# Altium PCB RF-UNIT.PcbDoc (part 1 of 3)
Units mm, origin at the board's own origin, x right, y up, seen from the top; angles counter-clockwise.
Board outline 187 x 77 mm, 2 copper layers (Top Layer, Top, Bottom Layer, Bottom); 286 components, 158 nets, 740 pads, 1203 vias.
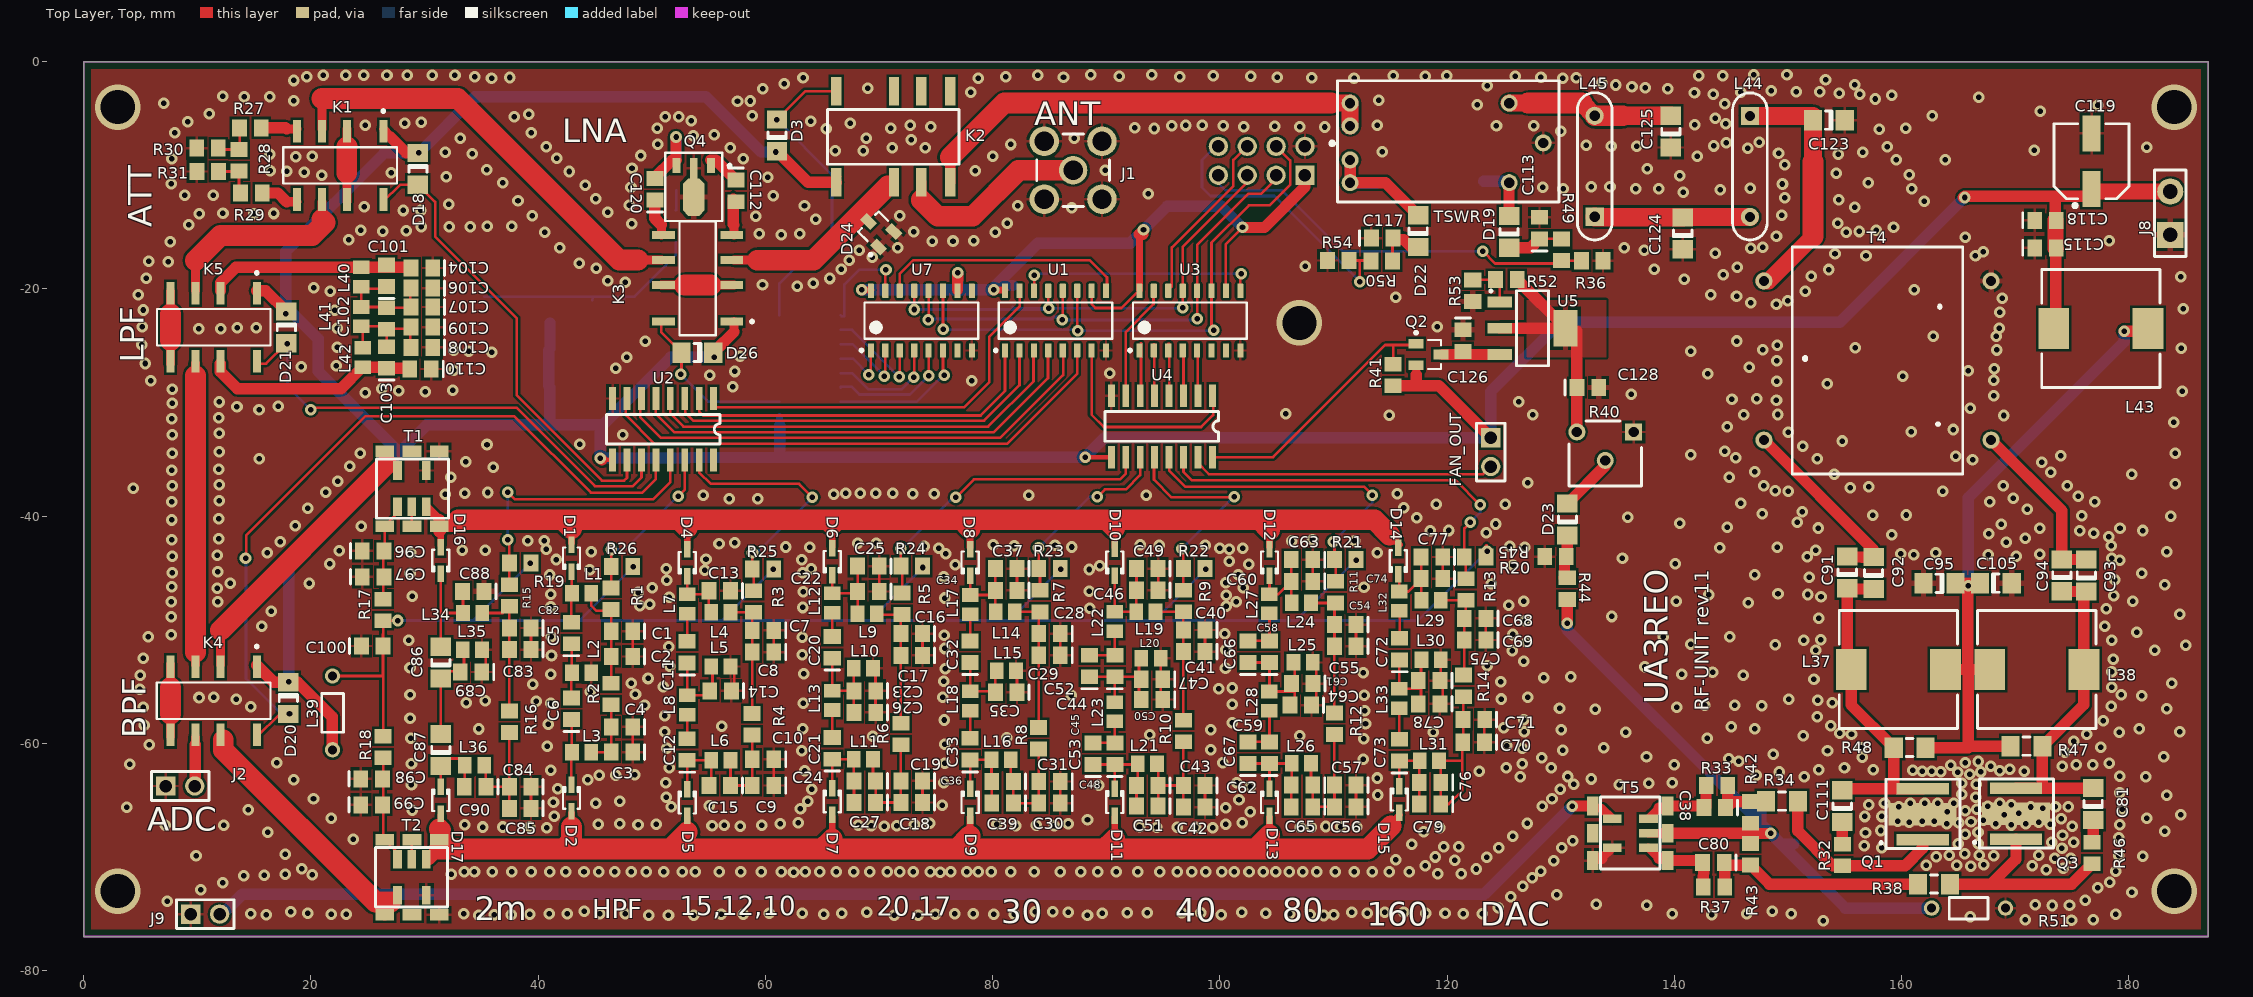
[diagram p0: Top Layer, Top view]
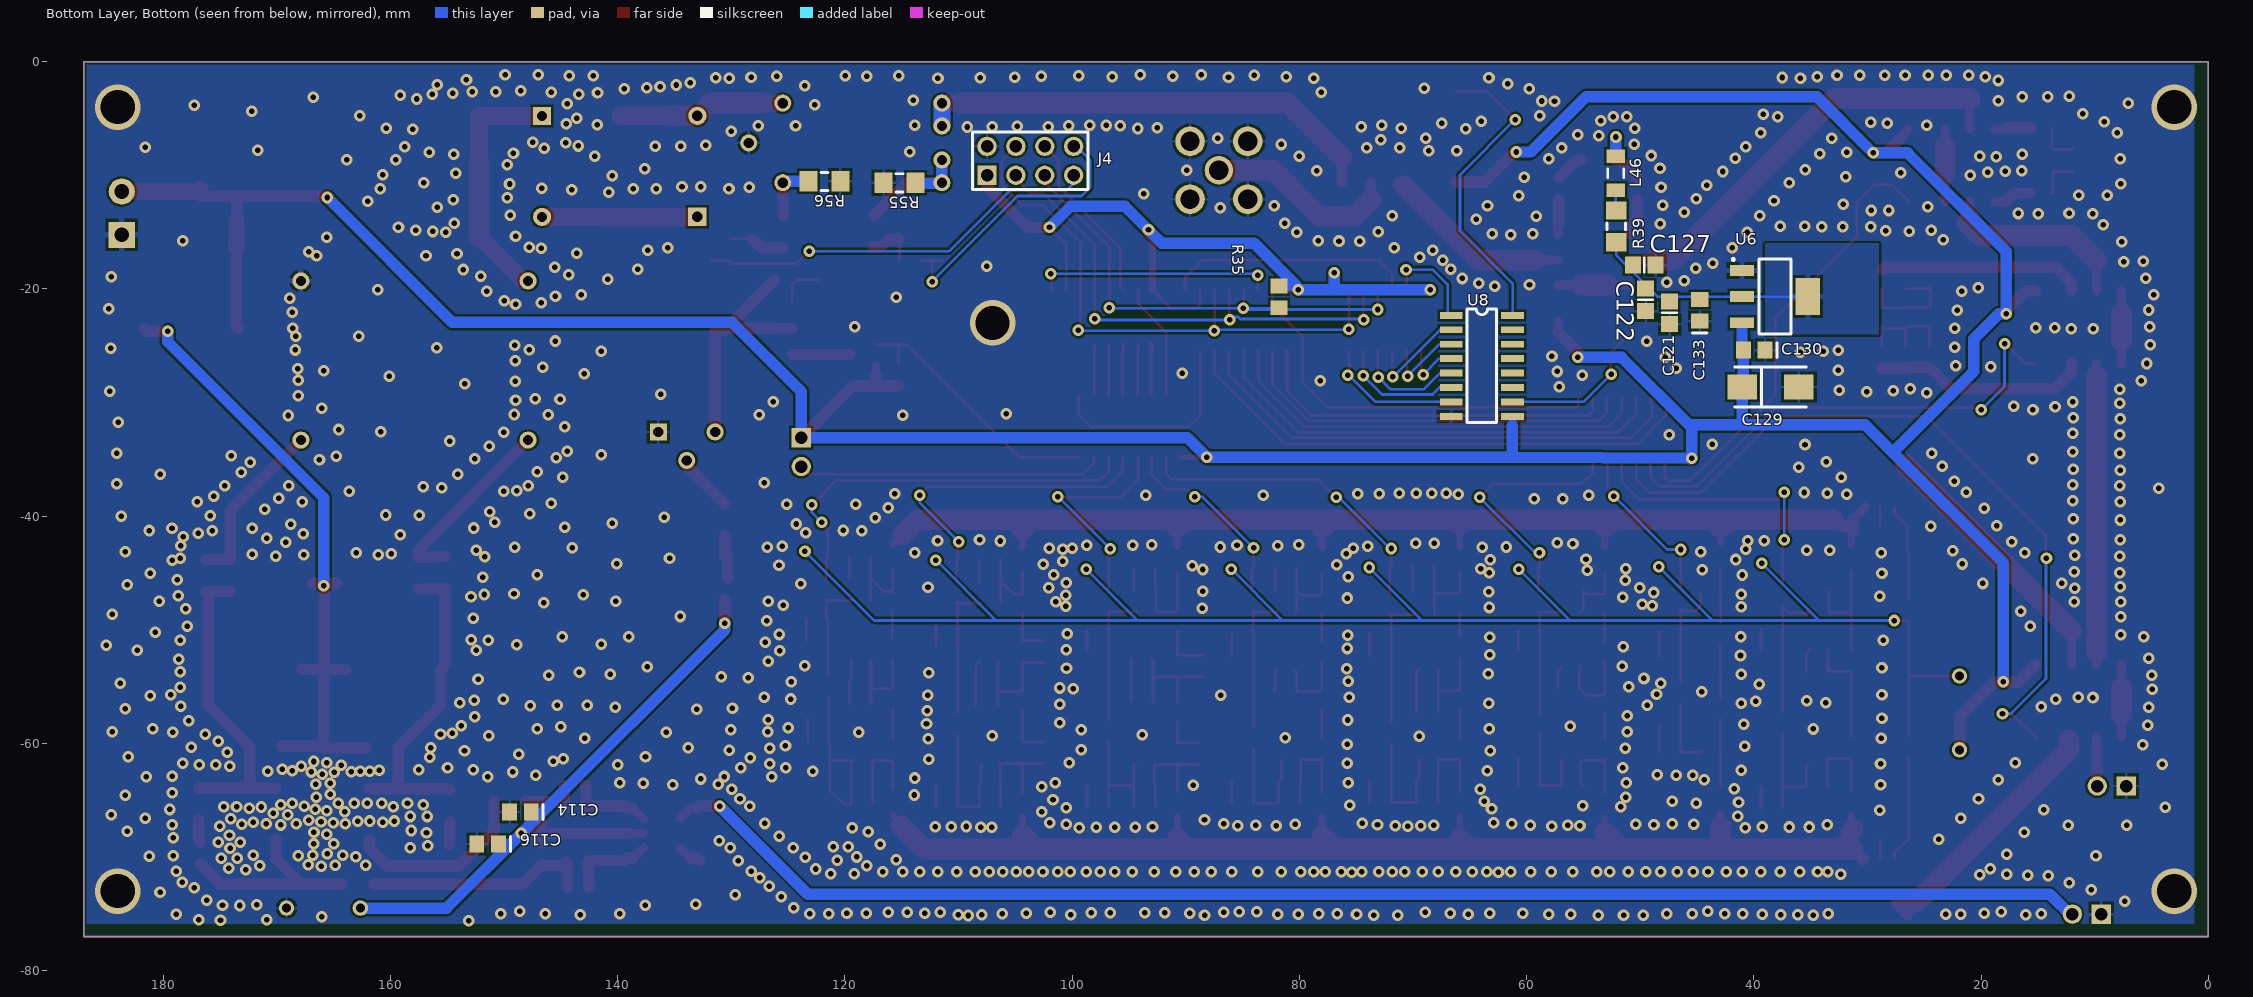
[diagram p1: Bottom Layer, Bottom view, seen from below]

## Layer stack, top to bottom
Top Solder, Top Mask: solder mask 0.0102, Solder Resist, Dk 3.5
Top Layer, Top: signal copper 0.0356
Dielectric 1: dielectric 0.32, FR-4, Dk 4.8
Bottom Layer, Bottom: signal copper 0.0356
Bottom Solder, Bot Mask: solder mask 0.0102, Solder Resist, Dk 3.5

## Board outline
0,-77 187,-77 187,0 0,0

## Design rules (kind name [scope] priority, off if disabled: settings)
BoardOutlineClearance [All] p1: gap=0.2 ignorepadtopadclearanceinfootprint=FALSE except(0.4: Arc-SplitBarrior Arc-SplitContinuation Track-SplitBarrior Track-SplitContinuation SMDPad-SplitBarrior SMDPad-SplitContinuation THPad-SplitBarrior THPad-SplitContinuation Via-SplitBarrior Via-SplitContinuation Fill-SplitBarrior Fill-SplitContinuation Poly-SplitBarrior Poly-SplitContinuation Region-SplitBarrior Region-SplitContinuation Text-SplitBarrior Text-SplitContinuation)
Clearance "Clearance Bottom Layer" [OnLayer('Bottom Layer')] p1: gap=0.203 ignorepadtopadclearanceinfootprint=TRUE except(0.254: Arc-Text Track-Text SMDPad-Text THPad-Text Via-Text Fill-Text Poly-Text Region-Text Text-Text)
Clearance "Clearance Top Layer" [OnLayer('Top Layer')] p2: gap=0.203 ignorepadtopadclearanceinfootprint=TRUE except(0.254: Arc-Text Track-Text SMDPad-Text THPad-Text Via-Text Fill-Text Poly-Text Region-Text Text-Text)
Clearance [All] p3: gap=0.2 ignorepadtopadclearanceinfootprint=FALSE except(0.089: Arc-Arc Arc-Track Arc-SMDPad Track-Track Track-SMDPad SMDPad-SMDPad; 0.127: Arc-Via Track-Via SMDPad-Via THPad-Via Via-Via; 0.254: Arc-Text Track-Text SMDPad-Text THPad-Text Via-Text Fill-Text Poly-Text Region-Text Text-Text)
HoleSize [All] p1: absolutevalues=TRUE maxlimit=6.3 minlimit=0.2 maxpercent=80.000 minpercent=20.000
MinimumAnnularRing [All] p1: minimumring=0.076
MinimumSolderMaskSliver [All] p1: minsoldermaskwidth=0.01
PolygonConnect PolygonConnect_1 [All] p1: thpad.connectstyle=Relief thpad.reliefconductorwidth=0.508 thpad.reliefentries=4 thpad.polygonreliefangle="90 Angle" thpad.airgapwidth=0.254 smdpad.connectstyle=Relief smdpad.reliefconductorwidth=0.508 smdpad.reliefentries=4 smdpad.polygonreliefangle="90 Angle" smdpad.airgapwidth=0.254 via.connectstyle=Direct via.reliefconductorwidth=0.508 via.reliefentries=4 via.polygonreliefangle="90 Angle" via.airgapwidth=0.254
RoomDefinition RF-UNIT [InComponentClass('RF-UNIT')] p1: confinementstyle=ConfineIn formatcopy=TRUE lockcomponents=FALSE outline 0,-77 187,-77 187,0 0,0
RoutingCorners [All] p1: cornerstyle=Round minsetback=2.54 maxsetback=2.54
RoutingVias [All] p1: holewidth=0.5 width=1 viastyle="Through Hole" minholewidth=0.2 minwidth=0.45 maxholewidth=1 maxwidth=2
SilkToSilkClearance [All] p1: silktosilkclearance=0.01
SilkToSolderMaskClearance [IsPad] p1: minsilkscreentomaskgap=0.01 clearancetoexposedcopper=TRUE
SolderMaskExpansion [All] p1: expansion=0.102
Width [All] p1: maxlimit=2.54 minlimit=0.089 preferedwidth=0.381
25 further rules are at their usual default settings.

## Components (designator, comment, footprint, x,y, rotation, side; value= is the part's Value field where it differs from the comment)
C1 "CAP_0805" CAP_0805#1 47.577,-50.131 r180 top value=470pF
C2 "CAP_0805" CAP_0805#1 47.577,-52.353 r180 top value=100nF
C3 "CAP_0805" CAP_0805#1 47.577,-60.767 r180 top value=100nF
C4 "CAP_0805" CAP_0805#1 47.577,-58.544 r180 top value=470pF
C5 "CAP_0805" CAP_0805#1 42.929,-50.492 r90 top value=100pF
C6 "CAP_0805" CAP_0805#1 42.929,-57.159 r90 top value=82pF
C7 "CAP_0805" CAP_0805#1 59.993,-50.059 r180 top value=470pF
C8 "CAP_0805" CAP_0805#1 59.993,-51.964 r180 top value=100nF
C9 "CAP_0805" CAP_0805#1 59.993,-63.711 r180 top value=100nF
C10 "CAP_0805" CAP_0805#1 59.993,-61.396 r180 top value=470pF
C11 "CAP_0805" CAP_0805#1 53.122,-52.166 r90 top value=18pF
C12 "CAP_0805" CAP_0805#1 53.122,-60.739 r90 top value=18pF
C13 "CAP_0805" CAP_0805#1 56.183,-46.566 r180 top value=47pF
C14 "CAP_0805" CAP_0805#1 56.261,-55.372 r180 top value=68pF
C15 "CAP_0805" CAP_0805#1 56.183,-63.711 r180 top value=47pF
C16 "CAP_0805" CAP_0805#1 73.076,-50.349 r180 top value=470pF
C17 "CAP_0805" CAP_0805#1 73.076,-52.254 r180 top value=100nF
C18 "CAP_0805" CAP_0805#1 73.076,-65.205 r180 top value=100nF
C19 "CAP_0805" CAP_0805#1 73.076,-63.3 r180 top value=470pF
C20 "CAP_0805" CAP_0805#1 65.888,-51.755 r90 top value=27pF
C21 "CAP_0805" CAP_0805#1 65.888,-60.645 r90 top value=27pF
C22 "CAP_0805" CAP_0805#1 69.266,-46.631 r180 top value=68pF
C23 "CAP_0805" CAP_0805#1 68.961,-55.372 r180 top value=120pF
C24 "CAP_0805" CAP_0805#1 68.948,-63.3 r180 top value=68pF
C25 "CAP_0805" CAP_0805#1 69.266,-44.408 r180 top value=10pF
C26 "CAP_0805" CAP_0805#1 68.961,-57.277 r180 top value=27pF
C27 "CAP_0805" CAP_0805#1 68.948,-65.205 r180 top value=10pF
C28 "CAP_0805" CAP_0805#1 85.209,-50.34 r180 top value=470pF
C29 "CAP_0805" CAP_0805#1 85.209,-52.245 r180 top value=100nF
C30 "CAP_0805" CAP_0805#1 85.209,-65.263 r180 top value=100nF
C31 "CAP_0805" CAP_0805#1 85.209,-63.358 r180 top value=470pF
C32 "CAP_0805" CAP_0805#1 78.021,-52.13 r90 top value=47pF
C33 "CAP_0805" CAP_0805#1 78.021,-60.703 r90 top value=47pF
C34 "CAP_0805" CAP_0805#1 81.399,-46.53 r180 top value=120pF
C35 "CAP_0805" CAP_0805#1 81.394,-55.501 r180 top value=220pF
C36 "CAP_0805" CAP_0805#1 81.081,-63.358 r180 top value=120pF
C37 "CAP_0805" CAP_0805#1 81.399,-44.625 r180 top value=33pF
C38 "CAP_0805" CAP_0805#1 143.764,-65.659 r180 top value=470pF
C39 "CAP_0805" CAP_0805#1 81.081,-65.263 r180 top value=33pF
C40 "CAP_0805" CAP_0805#1 97.942,-50.018 r180 top value=470pF
C41 "CAP_0805" CAP_0805#1 97.942,-51.923 r180 top value=100nF
C42 "CAP_0805" CAP_0805#1 97.942,-65.616 r180 top value=100nF
C43 "CAP_0805" CAP_0805#1 97.942,-63.711 r180 top value=470pF
C44 "CAP_0805" CAP_0805#1 90.754,-53.395 r90 top value=51pF
C45 "CAP_0805" CAP_0805#1 90.754,-61.108 r90 top value=51pF
C46 "CAP_0805" CAP_0805#1 93.814,-46.525 r180 top value=220pF
C47 "CAP_0805" CAP_0805#1 94.234,-54.356 r180 top value=360pF
C48 "CAP_0805" CAP_0805#1 93.814,-63.711 r180 top value=220pF
C49 "CAP_0805" CAP_0805#1 93.814,-44.62 r180 top value=33pF
C50 "CAP_0805" CAP_0805#1 94.234,-56.134 r180 top value=51pF
C51 "CAP_0805" CAP_0805#1 93.814,-65.524 r180 top value=33pF
C52 "CAP_0805" CAP_0805#1 88.531,-53.395 r90 top value=18pF
C53 "CAP_0805" CAP_0805#1 88.849,-61.108 r90 top value=18pF
C54 "CAP_0805" CAP_0805#1 111.237,-49.546 r180 top value=470pF
C55 "CAP_0805" CAP_0805#1 111.237,-51.451 r180 top value=100nF
C56 "CAP_0805" CAP_0805#1 111.237,-65.58 r180 top value=100nF
C57 "CAP_0805" CAP_0805#1 111.237,-63.675 r180 top value=470pF
C58 "CAP_0805" CAP_0805#1 104.367,-52.131 r90 top value=100pF
C59 "CAP_0805" CAP_0805#1 104.367,-61.021 r90 top value=100pF
C60 "CAP_0805" CAP_0805#1 107.427,-45.736 r180 top value=360pF
C61 "CAP_0805" CAP_0805#1 107.454,-54.737 r180 top value=680pF
C62 "CAP_0805" CAP_0805#1 107.427,-63.675 r180 top value=360pF
C63 "CAP_0805" CAP_0805#1 107.427,-43.831 r180 top value=68pF
C64 "CAP_0805" CAP_0805#1 107.315,-56.642 r180 top value=100pF
C65 "CAP_0805" CAP_0805#1 107.427,-65.58 r180 top value=68pF
C66 "CAP_0805" CAP_0805#1 102.462,-52.131 r90 top value=39pF
C67 "CAP_0805" CAP_0805#1 102.462,-61.021 r90 top value=39pF
C68 "CAP_0805" CAP_0805#1 122.669,-49 r180 top value=470pF
C69 "CAP_0805" CAP_0805#1 122.669,-50.905 r180 top value=100nF
C70 "CAP_0805" CAP_0805#1 122.533,-59.901 r180 top value=100nF
C71 "CAP_0805" CAP_0805#1 122.556,-57.906 r180 top value=470pF
C72 "CAP_0805" CAP_0805#1 115.822,-51.901 r90 top value=200pF
C73 "CAP_0805" CAP_0805#1 115.799,-60.791 r90 top value=200pF
C74 "CAP_0805" CAP_0805#1 118.859,-45.507 r180 top value=820pF
C75 "CAP_0805" CAP_0805#1 118.618,-54.483 r180 top value=1000pF
C76 "CAP_0805" CAP_0805#1 118.701,-63.446 r180 top value=820pF
C77 "CAP_0805" CAP_0805#1 118.859,-43.602 r180 top value=120pF
C78 "CAP_0805" CAP_0805#1 118.618,-56.515 r180 top value=220pF
C79 "CAP_0805" CAP_0805#1 118.701,-65.351 r180 top value=120pF
C80 "CAP_0805" CAP_0805#1 143.637,-70.485 r180 top value=470pF
C81 "CAP_1206" CAP_1206 176.866,-65.341 r90 top value=47nF
C82 "CAP_0805" CAP_0805#1 38.62,-49.848 r180 top value=470pF
C83 "CAP_0805" CAP_0805#1 38.62,-51.753 r180 top value=100nF
C84 "CAP_0805" CAP_0805#1 38.62,-63.817 r180 top value=100nF
C85 "CAP_0805" CAP_0805#1 38.62,-65.722 r180 top value=470pF
C86 "CAP_0805" CAP_1206 31.432,-52.903 r90 top value=6.5-30pF
C87 "CAP_0805" CAP_1206 31.432,-60.579 r90 top value=6.5-30pF
C88 "CAP_0805" CAP_0805#1 34.493,-46.622 r180 top value=120pF
C89 "CAP_0805" CAP_0805#1 34.29,-53.721 r180 top value=100pF
C90 "CAP_0805" CAP_0805#1 34.652,-63.817 r180 top value=120pF
C91 "CAP_1206" CAP_1206 155.219,-44.946 r90 top value="2.2uF 100V"
C92 "CAP_1206" CAP_1206 157.533,-45.008 r90 top value="1800pF 100V"
C93 "CAP_1206" CAP_1206 176.257,-45.229 r90 top value="2.2uF 100V"
C94 "CAP_1206" CAP_1206 174.108,-45.213 r90 top value="1800pF 100V"
C95 "CAP_1206" CAP_1206 163.338,-45.911 r180 top value="2.2uF 100V"
C96 "CAP_0805" CAP_0805#1 25.273,-43.053 r0 top value=470pF
C97 "CAP_0805" CAP_0805#1 25.273,-45.339 r0 top value=100nF
C98 "CAP_0805" CAP_0805#1 25.146,-63.119 r0 top value=470pF
C99 "CAP_0805" CAP_0805#1 25.146,-65.405 r0 top value=100nF
C100 "CAP_0805" CAP_0805#1 25.197,-51.435 r0 top value=100nF
C101 "CAP_0805" CAP_0805#1 26.67,-19.05 r90 top value=82pF
C102 "CAP_0805" CAP_0805#2 26.67,-22.606 r90 top value=120pF
C103 "CAP_0805" CAP_0805#1 26.668,-26.235 r90 top value=22pF
C104 "CAP_0805" CAP_0805#1 29.972,-18.161 r180 top value=51pF
C105 "CAP_1206" CAP_1206 168.291,-45.898 r0 top value="1800pF 100V"
C106 "CAP_0805" CAP_0805#1 29.972,-19.939 r180 top value=10pF
C107 "CAP_0805" CAP_0805#1 29.972,-21.59 r180 top value=100pF
C108 "CAP_0805" CAP_0805#1 29.972,-25.146 r180 top value=33pF
C109 "CAP_0805" CAP_0805#1 29.972,-23.368 r180 top value=100pF
C110 "CAP_0805" CAP_0805#1 29.845,-27.051 r180 top value=100pF
C111 "CAP_1206" CAP_1206 154.778,-65.532 r90 top value=47nF
C112 "CAP_0805" CAP_0805#1 57.404,-11.176 r270 top value=10n
C113 "CAP_0805" CAP_0805#1 128.132,-14.854 r90 top value=100nF
C114 "CAP_0805" CAP_0805#1 148.361,-66.04 r0 bottom value=8200pF
C115 "CAP_0805" CAP_0805#1 172.466,-16.383 r0 top value=1nF
C116 "CAP_0805" CAP_0805#1 151.244,-68.861 r0 bottom value=100n
C117 "CAP_0805" CAP_0805#1 114.086,-15.533 r0 top value=100nF
C118 "CAP_0805" CAP_0805#1 172.466,-13.97 r0 top value=100nF
C119 "CAPAE_6.6x6.6h5.4" CAPAE_6.6x6.6h5.4 176.721,-8.855 r90 top value=47uF
C120 "CAP_0805" CAP_0805#1 50.292,-11.43 r90 top value=10n
C121 "CAP_0805" 6-0805_M 47.416,-22.107 r90 bottom value=10n
C122 "CAP_0805" 6-0805_M 49.53,-20.955 r90 bottom value=1n
C123 "CAP_1206" CAP_1206 153.593,-5.147 r180 top value=120pF
C124 "CAP_1206" CAP_1206 140.74,-15.111 r90 top value=180pF
C125 "CAP_1206" CAP_1206 139.689,-6.157 r90 top value=120pF
C126 "CAP_0805" CAP_0805#1 121.404,-24.353 r270 top value=1uF
C127 "CAP_0805" 6-0805_M 49.641,-17.907 r0 bottom value=100p
C128 "CAP_0805" CAP_0805#1 132.193,-28.674 r0 top value=1uF
C129 "CAPAE_5.3x5.3h6.1" CAPAE_5.3x5.3h6.1 38.536,-28.638 r180 bottom value="10uF 25V"
C130 "CAP_0805" CAP_0805#1 39.77,-25.387 r0 bottom value=100n
C133 "CAP_0805" CAP_0805#1 44.765,-22.082 r90 bottom value=100n
D1 "BAP64-03" SOD-323 42.929,-43.705 r270 top
D2 "BAP64-03" SOD-323 42.929,-64.812 r90 top
D3 "1N4148" 1N4148 61.024,-6.483 r90 top
D4 "BAP64-03" SOD-323 53.122,-44.109 r270 top
D5 "BAP64-03" SOD-323 53.122,-65.216 r90 top
D6 "BAP64-03" SOD-323 65.888,-44.015 r270 top
D7 "BAP64-03" SOD-323 65.888,-65.122 r90 top
D8 "BAP64-03" SOD-323 78.021,-44.073 r270 top
D9 "BAP64-03" SOD-323 78.021,-65.18 r90 top
D10 "BAP64-03" SOD-323 90.754,-44.068 r270 top
D11 "BAP64-03" SOD-323 90.754,-65.175 r90 top
D12 "BAP64-03" SOD-323 104.367,-44.073 r270 top
D13 "BAP64-03" SOD-323 104.367,-65.18 r90 top
D14 "BAP64-03" SOD-323 115.697,-43.942 r270 top
D15 "BAP64-03" SOD-323 115.799,-64.951 r90 top
D16 "BAP64-03" SOD-323 31.432,-43.898 r270 top
D17 "BAP64-03" SOD-323 31.432,-65.005 r90 top
D18 "1N4148" 1N4148 29.421,-9.439 r270 top
D19 "DIODE_1206" DIODE_1206 125.452,-14.977 r90 top value=1N4148
D20 "1N4148" 1N4148 18.018,-56.016 r270 top
D21 "1N4148" 1N4148 17.843,-23.387 r270 top
D22 "DIODE_1206" DIODE_1206 117.452,-14.925 r90 top value=1N4148
D23 "SS14" SS14 130.592,-40.298 r90 top
D24 "BAV99" SOT23 69.85,-14.859 r45 top
D26 "1N4148" 1N4148 54.021,-25.607 r180 top
FAN_OUT "51022-0200" 51022-0200 124.478,-34.365 r270 top
J1 "31-5431" 31-5431 87.086,-9.559 r180 top value=ANT
J2 "644456-2" 644456-2 8.509,-63.119 r0 top value=ADC_OUT
J4 "90131-0124" 90131-0124 103.682,-8.727 r180 bottom value=MOTHERBOARD
J8 "1986717-2" 1986717-2 183.648,-13.338 r90 top value=13.8V
J9 "644456-2" 644456-2 10.7,-74.395 r0 top value=DAC_IN
K1 "IM06DGR" TECO-SMT-8_V 22.575,-9.129 r270 top
K2 "Axicom V23079" V23079 66.234,-6.614 r90 top
K3 "IM06DGR" TECO-SMT-8_V 54.044,-19.074 r180 top
K4 "IM06DGR" TECO-SMT-8_V 11.442,-56.252 r270 top
K5 "IM06DGR" TECO-SMT-8_V 11.447,-23.374 r270 top
L1 "IND_0805" IND_0805 43.825,-46.797 r180 top value=470nH
L2 "IND_0805" IND_0805 43.825,-53.782 r180 top value=150nH
L3 "IND_0805" IND_0805 43.825,-60.767 r180 top value=150nH
L4 "IND_0805" IND_0805 56.083,-48.471 r180 top value=680nH
L5 "IND_0805" IND_0805 56.083,-53.234 r180 top value=470nH
L6 "IND_0805" IND_0805 56.083,-61.489 r180 top value=680nH
L7 "IND_0805" IND_0805 53.122,-47.734 r270 top value=1.5uH
L8 "IND_0805" IND_0805 53.122,-56.624 r270 top value=1.5uH
L9 "IND_0805" IND_0805 68.96,-48.581 r180 top value=1.2uH
L10 "IND_0805" IND_0805 68.623,-53.406 r180 top value=680nH
L11 "IND_0805" IND_0805 68.623,-61.395 r180 top value=1.2uH
L12 "IND_0805" IND_0805 65.888,-47.64 r270 top value=3.3uH
L13 "IND_0805" IND_0805 65.888,-56.212 r270 top value=3.3uH
L14 "IND_0805" IND_0805 81.114,-48.435 r180 top value=1.5uH
L15 "IND_0805" IND_0805 81.206,-53.596 r180 top value=1.2uH
L16 "IND_0805" IND_0805 80.756,-61.453 r180 top value=1.5uH
L17 "IND_0805" IND_0805 78.021,-47.79 r270 top value=5.6uH
L18 "IND_0805" IND_0805 78.021,-56.27 r270 top value=5.6uH
L19 "IND_0805" IND_0805 93.488,-48.43 r180 top value=2.7uH
L20 "IND_0805" IND_0805 93.939,-52.517 r180 top value=1.5uH
L21 "IND_0805" IND_0805 93.621,-61.806 r180 top value=2.7uH
L22 "IND_0805" IND_0805 90.754,-49.28 r270 top value=10uH
L23 "IND_0805" IND_0805 90.754,-57.218 r270 top value=10uH
L24 "IND_0805" IND_0805 107.168,-47.641 r180 top value=4.7uH
L25 "IND_0805" IND_0805 107.327,-52.88 r180 top value=2.7uH
L26 "IND_0805" IND_0805 107.168,-61.77 r180 top value=4.7uH
L27 "IND_0805" IND_0805 104.367,-47.713 r270 top value=15uH
L28 "IND_0805" IND_0805 104.367,-56.285 r270 top value=15uH
L29 "IND_0805" IND_0805 118.6,-47.412 r180 top value=6.8uH
L30 "IND_0805" IND_0805 118.6,-52.651 r180 top value=4.7uH
L31 "IND_0805" IND_0805 118.442,-61.541 r180 top value=6.8uH
L32 "IND_0805" IND_0805 115.799,-47.483 r270 top value=33uH
L33 "IND_0805" IND_0805 115.799,-56.056 r270 top value=33uH
L34 "IND_0805" IND_0805 34.234,-48.527 r180 top value=8.2nH
L35 "IND_0805" IND_0805 34.215,-51.753 r180 top value=8.2nH
L36 "IND_0805" IND_0805 34.393,-61.912 r180 top value=8.2nH
L37 "IND_FERRITE_CORE" IND_FERRITE_CORE 159.712,-53.496 r0 top value=10uH
L38 "IND_FERRITE_CORE" IND_FERRITE_CORE 171.898,-53.491 r0 top value=10uH
L39 "IND_FERRITE_BEAD" IND_FERRITE_BEAD 21.907,-57.318 r270 top value=FB
L40 "IND_0805" IND_0805 24.447,-18.948 r270 top value=150nH
L41 "IND_0805" IND_0805 24.447,-22.44 r270 top value=150nH
L42 "IND_0805" IND_0805 24.55,-26.035 r270 top value=330nH
L43 "IND_FERRITE_CORE" IND_FERRITE_CORE 177.535,-23.481 r180 top value=10uH
L44 "IND_FERRITE_CORE" IND_FERRITE_CORE_1 146.654,-9.22 r270 top value=169nH
L45 "IND_FERRITE_CORE" IND_FERRITE_CORE_1 132.988,-9.214 r90 top value=169nH
L46 "IND_1206" IND_1206 52.157,-9.822 r90 bottom value=220nH
Q1 "RD07MVS1" RD07MVS1 161.567,-66.213 r0 top
Q2 "MOSFET_ENH_PD" SOT23 118.364,-25.781 r270 top value=IRLML9301
Q3 "RD07MVS1" RD07MVS1 169.791,-66.173 r0 top
Q4 "PGA-103+" SOT89 53.697,-10.532 r180 top
R1 "RES_0805" RES_0805 46.422,-47.27 r270 top value=56
R2 "RES_0805" RES_0805 46.422,-55.658 r270 top value=120
R3 "RES_0805" RES_0805 58.965,-47.516 r270 top value=56
R4 "RES_0805" RES_0805 58.837,-58.311 r270 top value=120
R5 "RES_0805" RES_0805 72.036,-47.714 r270 top value=56
R6 "RES_0805" RES_0805 71.92,-59.17 r270 top value=120
R7 "RES_0805" RES_0805 84.169,-47.48 r270 top value=56
R8 "RES_0805" RES_0805 84.054,-59.545 r270 top value=120
R9 "RES_0805" RES_0805 96.786,-47.475 r270 top value=56
R10 "RES_0805" RES_0805 96.786,-58.905 r270 top value=120
R11 "RES_0805" RES_0805 110.198,-46.686 r270 top value=56
R12 "RES_0805" RES_0805 110.082,-58.275 r270 top value=120
R13 "RES_0805" RES_0805 121.654,-46.457 r270 top value=56
R14 "RES_0805" RES_0805 121.424,-54.94 r270 top value=120
R15 "RES_0805" RES_0805 37.465,-46.988 r270 top value=56
R16 "RES_0805" RES_0805 37.465,-58.1 r270 top value=120
R17 "RES_0805" RES_0805 26.352,-48.258 r270 top value=220
R18 "RES_0805" RES_0805 26.352,-60.323 r270 top value=220
R19 "RES_0805" RES_0805 38.42,-44.133 r180 top value=10k
R20 "RES_0805" RES_0805 122.469,-43.602 r180 top value=10k
R21 "RES_0805" RES_0805 111.037,-43.831 r180 top value=10k
R22 "RES_0805" RES_0805 97.741,-44.62 r180 top value=10k
R23 "RES_0805" RES_0805 85.009,-44.625 r180 top value=10k
R24 "RES_0805" RES_0805 72.875,-44.408 r180 top value=10k
R25 "RES_0805" RES_0805 59.793,-44.661 r180 top value=10k
R26 "RES_0805" RES_0805 47.377,-44.416 r180 top value=10k
R27 "RES_0805" RES_0805 14.677,-5.822 r180 top value=15
R28 "RES_0805" RES_0805 13.665,-8.681 r270 top value=39
R29 "RES_0805" RES_0805 14.764,-11.564 r0 top value=15
R30 "RES_0805" RES_0805 10.905,-7.615 r0 top value=68
R31 "RES_0805" RES_0805 10.915,-9.67 r0 top value=68
R32 "RES_0805" RES_0805 154.796,-69.821 r90 top value=560
R33 "RES_0805" RES_0805 143.749,-63.723 r0 top value=5.6
R34 "RES_1206" RES_1206 149.477,-65.084 r0 top value=5.6
R35 "RES_0805" RES_0805 81.788,-20.701 r270 bottom value=1k
R36 "RES_0805" RES_0805 132.773,-17.523 r0 top value=510
R37 "RES_0805" RES_0805 143.494,-72.649 r0 top value=5.6
R38 "RES_1206" RES_1206 162.858,-72.385 r0 top value=5.6
R39 "RES_1206" RES_1206 52.111,-14.492 r90 bottom value=18
R40 "306J" 306J 133.921,-34.495 r270 top value=1k
R41 "RES_0805" RES_0805 115.259,-27.582 r270 top value=10k
R42 "RES_0805" RES_0805 146.703,-66.077 r90 top value=1k
R43 "RES_0805" RES_0805 146.7,-69.766 r90 top value=1k
R44 "RES_0805" RES_0805 130.575,-46.383 r270 top value=56
R45 "RES_0805" RES_0805 129.54,-43.561 r0 top value=10k
R46 "RES_0805" RES_0805 176.765,-69.649 r90 top value=560
R47 "RES_1206" RES_1206 170.992,-60.246 r180 top value=300
R48 "RES_1206" RES_1206 160.706,-60.371 r180 top value=300
R49 "RES_0805" RES_0805 130.078,-16.561 r270 top value=0
R50 "RES_0805" RES_0805 114.246,-17.542 r180 top value=0
R51 "RES" RES 165.898,-74.5 r0 top value="TERMO 1K"
R52 "RES_0805" RES_0805 125.222,-19.177 r180 top value=200
R53 "RES_0805" RES_0805 122.258,-20.157 r90 top value=1.2k
R54 "RES_0805" RES_0805 110.427,-17.501 r0 top value=510
R55 "RES_1206" RES_1206 115.189,-10.668 r0 bottom value=50
R56 "RES_1206" RES_1206 121.793,-10.541 r180 bottom value=50
T1 "TRANSF_ACORE2" TRANSF_ACORE2 28.892,-37.576 r90 top value="1:4 ADT4-6T"
T2 "TRANSF_ACORE2" TRANSF_ACORE2_1 28.892,-71.786 r270 top value="1:4 ADT4-6T"
T4 "TRANSF_ICORE" TRANSF_ICORE 157.881,-26.302 r90 top value="Balun 4turns rg-178 on binocle"
T5 "TRANSF_ACORE2" TRANSF_ACORE2_2 136.126,-67.915 r180 top value="1:1 ADT1-6T"
TSWR "SWR_TANDEM_MATCH" SWR_TANDEM_MATCH 120.111,-7.018 r0 top
U1 "SN74HC595D" D0016A_L 85.538,-22.793 r90 top
U2 "ULN2003BDR" ULN2003BDR 51,-32.351 r270 top value=ULN2003
U3 "SN74HC595D" D0016A_L 97.362,-22.793 r90 top
U4 "ULN2003BDR" ULN2003BDR 94.895,-32.108 r270 top value=ULN2003
U5 "LT1117IST-ADJ" LT1117IST-ADJ 127.524,-23.378 r0 top value=LT1117-ADJ
U6 "AMS1117-5" AMS1117-5 38.146,-20.595 r180 bottom
U7 "SN74HC595D" D0016A_L 73.733,-22.793 r90 top
U8 "ULN2003BDR" ULN2003BDR 63.936,-26.774 r180 bottom value=ULN2003

## Footprints (in the part's own frame and the unit in brackets; to place one, negate y for a bottom-side part, rotate by r counter-clockwise, add the part's x,y. Pads: shape width x height; smd on the part's side, far side on the other; paste and mask are expansions set on the pad)
1N4148 [mm]
  rect 1.6x1.8 smd: 1(-1.4,0) 2(1.4,0)
  silkscreen extent -0.3,-0.8 0.3,0.8
6-0805_M [mm] "Chip Resistor, Body 2.0x1.2mm, IPC Low Density"
  rect 1.4x1.5 smd: 1(-1,0) 2(1,0)
  silkscreen extent 0,-0.65 0,0.65, body extent -1.07,-0.7 1.07,0.7, height 0.7
31-5431 [mm]
  round 2.6 hole 1.7: 1(-2.54,-2.54) 2(2.54,-2.54) 3(2.54,2.54) 4(-2.54,2.54)
  round 2.5 hole 1.7: 5(0,0)
  silkscreen extent -3.2,-3.2 3.2,3.2
306J [mm]
  rect 1.5x1.5 hole 0.9: 1(-1.9,2.5)
  round 1.5 hole 0.9: 2(0.6,0) 3(-1.9,-2.5)
  silkscreen extent -2.85,-3.2 2.85,3.2
51022-0200 [mm]
  rect 1.7x1.7 hole 1.1: 1(-1.27,-0.635)
  round 1.7 hole 1.1: 2(1.27,-0.635)
  silkscreen extent -2.54,-1.91 2.54,0.64
90131-0124 [mm]
  rect 1.7x1.7 hole 1.1: 1(-3.81,-1.27)
  round 1.7 hole 1.1: 2(-3.81,1.27) 3(-1.27,-1.27) 4(-1.27,1.27) 5(1.27,-1.27) 6(1.27,1.27) 7(3.81,-1.27) 8(3.81,1.27)
  silkscreen extent -5.08,-2.54 5.08,2.54
644456-2 [mm]
  rect 1.7x1.7 hole 1.1: 1(-1.27,-0.635)
  round 1.7 hole 1.1: 2(1.27,-0.635)
  silkscreen extent -2.54,-1.91 2.54,0.64
1986717-2 [mm]
  rect 2.3x2.3 hole 1.3: 1(-1.905,0)
  round 2.3 hole 1.3: 2(1.905,0)
  silkscreen extent -3.81,-1.4 3.81,1.4
AMS1117-5 [mm]
  rect 2.15x0.95 smd: 1(-2.9,2.215) 2(-2.9,-0.085) 3(-2.9,-2.385)
  rect 2.15x3.25 smd: 4(2.9,-0.085)
  silkscreen extent -3.86,-3.38 1.4,3.38
CAP_0805#1 [mm]
  rect 1.3x1.5 smd: 1(-0.75,0) 2(1.15,0)
  silkscreen extent -1.8,-0.65 -1.8,0.65
CAP_0805#2 [mm]
  rect 1.3x1.5 smd: 1(-0.95,0) 2(0.95,0)
CAP_1206 [mm]
  rect 1.6x1.8 smd: 1(-1.4,0) 2(1.4,0)
  silkscreen extent -0.3,-0.8 0.3,0.8
CAPAE_5.3x5.3h6.1 [mm]
  rect 2.6x2.2 smd: 1(-2.5,0) 2(2.5,0)
  silkscreen extent -3.15,-1.75 3.15,1.75
CAPAE_6.6x6.6h5.4 [mm]
  rect 3.15x1.6 smd: 1(-2.362,0) 2(2.538,0)
  silkscreen extent -4.11,-3.3 3.39,3.3
D0016A_L [mm] "SOIC, 16-Leads, Body 10x4mm, Pitch 1.27mm, IPC High Density"
  rrect18% 1.25x0.55 smd: 1(-2.625,4.445) 2(-2.625,3.175) 3(-2.625,1.905) 4(-2.625,0.635) 5(-2.625,-0.635) 6(-2.625,-1.905) 7(-2.625,-3.175) 8(-2.625,-4.445) 9(2.625,-4.445) 10(2.625,-3.175) 11(2.625,-1.905) 12(2.625,-0.635) 13(2.625,0.635) 14(2.625,1.905) 15(2.625,3.175) 16(2.625,4.445)
  silkscreen extent -2.75,-5 1.6,5.39, body extent -3,-4.95 3,4.95, height 1.59
DIODE_1206 [mm]
  rect 1.6x1.8 smd: 1(-1.4,0) 2(1.4,0)
  silkscreen extent -0.3,-0.8 0.3,0.8
IND_0805 [mm]
  rect 1.2x1.45 smd: 1(-0.85,0) 2(0.85,0)
IND_1206 [mm]
  rect 1.2x1.6 smd: 1(-1.5,0) 2(1.5,0)
  silkscreen extent -0.4,-0.7 0.4,0.7
IND_FERRITE_BEAD [mm]
  round 1.35 hole 0.8: 1(-3.25,0) 2(3.25,0)
  silkscreen extent -1.7,-0.95 1.7,0.95
IND_FERRITE_CORE [mm]
  rect 2.7x3.6 smd: 1(-4.15,0) 2(4.15,0)
  silkscreen extent -5.2,-5.2 5.2,5.2
IND_FERRITE_CORE_1 [mm]
  rect 1.6x1.6 hole 0.9: 1(-4.445,0)
  round 1.6 hole 0.9: 2(4.445,0)
  silkscreen extent -6.47,-1.52 6.47,1.52
LT1117IST-ADJ [mm]
  rect 2.15x0.95 smd: 1(-2.9,2.215) 2(-2.9,-0.085) 3(-2.9,-2.385)
  rect 2.15x3.25 smd: 4(2.9,-0.085)
  silkscreen extent -3.86,-3.38 1.4,3.38
RD07MVS1 [mm]
  rect 4.6x1 smd: 1(0.285,2.22) 3(0.285,-2.28)
  rect 6x2 smd: 2(0.285,-0.03)
  silkscreen extent -3.56,-3.05 3.56,3.05
RES [mm]
  round 1.35 hole 0.8: 1(-3.25,0) 2(3.25,0)
  silkscreen extent -1.7,-0.95 1.7,0.95
RES_0805 [mm]
  rect 1.3x1.5 smd: 1(-0.95,0) 2(0.95,0)
RES_1206 [mm]
  rect 1.6x1.8 smd: 1(-1.4,0) 2(1.4,0)
  silkscreen extent -0.3,-0.8 0.3,0.8
SOD-323 [mm] "SOD-323/SC-76; 2 Leads; Body 1.7 x 1.3 mm, (LxW)"
  rect 1.45x0.55 smd: 1(1.175,0) 2(-1.175,0)
  silkscreen extent -0.95,-0.75 0.95,0.75
SOT23 [mm] "SOT-23; 3 Leads; Body 3.0 x 2.6 mm, inc. leads (LxW max)"
  rect 0.85x1.3 smd: 1(-0.95,-1.1) 2(0.95,-1.1) 3(0,1.1)
  silkscreen extent -2.05,-1.22 1.28,1.1
SOT89 [mm] "SOT-89; Body 4.6 x 4.25 mm, inc. leads (LxW max)"
  oct 1.9x3.3 smd: 0(0,1.388)
  rect 0.7x1.35 smd: 1(-1.5,-1.388) 3(1.5,-1.388)
  rect 0.7x1.8 smd: 2(0,-1.162)
  silkscreen extent -3.28,-2.51 2.5,3.49
SS14 [mm]
  rect 1.6x1.8 smd: 1(-1.4,0) 2(1.4,0)
  silkscreen extent -0.3,-0.8 0.3,0.8
SWR_TANDEM_MATCH [mm]
  round 1.5 hole 0.9: 1(5.355,3.365) 2(-8.645,3.365) 3(5.355,-3.635) 4(-8.645,-3.635) 5(-8.645,1.365) 6(-8.645,-1.635) 7(8.355,-0.135)
  silkscreen extent -9.74,-5.34 9.74,5.34
TECO-SMT-8_V [mm] "SMT, 8-Leads, Body 10 x 6 mm"
  rect 2x0.7 smd paste+0: 1(-3,3.8) 2(-3,0.6) 3(-3,-1.6) 4(-3,-3.8) 5(3,-3.8) 6(3,-1.6) 7(3,0.6) 8(3,3.8)
  silkscreen extent -4.9,-5 1.6,5, body extent -3,-5 3,5, height 5.65
TRANSF_ACORE2 [mm]
  rect 1x1.65 smd: 1(-3.3,2.4) 2(-3.3,0) 3(-3.3,-2.4) 4(3.3,-2.4) 5(3.3,0) 6(3.3,2.4)
  rect 1.65x0.76 smd: 7(-1.59,1.27) 8(-1.59,0) 9(-1.59,-1.27) 10(1.59,1.27) 11(1.59,-1.27)
  silkscreen extent -2.61,-3.21 2.61,3.13
TRANSF_ACORE2_1 [mm]
  rect 1x1.65 smd: 1(-3.3,2.4) 2(-3.3,0) 3(-3.3,-2.4) 4(3.3,-2.4) 5(3.3,0) 6(3.3,2.4)
  rect 1.65x0.76 smd: 7(-1.59,1.27) 8(-1.59,0) 9(-1.59,-1.27) 10(1.59,1.27) 11(1.59,-1.27)
  silkscreen extent -2.61,-3.21 2.61,3.13
TRANSF_ACORE2_2 [mm]
  rect 1x1.65 smd: 1(-3.3,2.4) 2(-3.3,0) 3(-3.3,-2.4) 4(3.3,-2.4) 5(3.3,0) 6(3.3,2.4)
  rect 1.65x0.76 smd: 7(-1.59,1.27) 8(-1.59,0) 9(-1.59,-1.27) 10(1.59,1.27) 11(1.59,-1.27)
  silkscreen extent -2.61,-3.21 2.61,3.13
TRANSF_ICORE [mm]
  round 1.5 hole 0.9: 1(-7,10) 2(7,10) 3(-7,-10) 4(7,-10)
  silkscreen extent -10,-7.5 10,7.5
ULN2003BDR [mm]
  rect 2x0.6 smd: 1(-2.7,4.445) 2(-2.7,3.175) 3(-2.7,1.905) 4(-2.7,0.635) 5(-2.7,-0.635) 6(-2.7,-1.905) 7(-2.7,-3.175) 8(-2.7,-4.445) 9(2.7,-4.445) 10(2.7,-3.175) 11(2.7,-1.905) 12(2.7,-0.635) 13(2.7,0.635) 14(2.7,1.905) 15(2.7,3.175) 16(2.7,4.445)
  silkscreen extent -1.3,-5 1.3,5
V23079 [mm]
  rect 2.5x0.9 smd: 1(-4,0) 2(-4,-5.08) 3(-4,-7.49) 4(-4,-10.03) 5(4,-10.03) 6(4,-7.49) 7(4,-5.08) 8(4,0)
  silkscreen extent -2.41,-10.79 2.41,0.76

## Part data
K1 K3 K4 K5: library part CMP-2000-05421-1, "Signal Relay, 5 A, 12 VDC, -40 to 85 degC, 8-Pin SMD, RoHS, Tape and Reel", Coil Power Cont=140mW, Coil Resistance=1.028kohm, Coil Voltage VDC Nom=12V, Contact Current AC Max=2A, Contact Current Max=5A, Contact Resistance=50mohm, Contact Voltage AC Nom=250V, Contact Voltage DC Nom=220V, Dielectric Voltage Coil to Contact=1800V, Dielectric Voltage Contact to Contact=1000V, Insulation Resistance=1000Mohm, Insulation Resistance Voltage=500VDC, Manufacturer="TE Connectivity", Operating Temperature Max=85degC, Operating Temperature Min=-40degC, Operating Voltage Range=9Vto28.9V, Package Description="8-Pin Surface Mount Device, Body 10 x 6 mm", Package Reference=SMT-8, Switching Power Max=62.5VA, Switching Voltage AC / DC Max=250VAC, Switching Voltage AC / DC Min=100µV, Switching Voltage Max=220VDC, Switch Power Max=60W, Approval Bodies=EN/IEC, Approval Category=ULRecognised, Coil Type=DC, Contact Configuration=DPCO, Contact Current DC Max=2A, Datasheet URL=http://www.farnell.com/datasheets/1717896.pdf, Datasheet Version="Rev. 0411, 04/2011", DC Coil Power=140mW, External Depth=10mm, External Height=5.65mm, External Length / Height=5.65mm, External Width=6mm, Manufacturer URL=http://www.te.com/, Mounting Type=SMT, MSL=MSL3-168hours, No. of Pins=8, No. of Poles=2, Relay Mounting=SMD, Series=IM
L37 L38 L43 L44 L45: "Inductor"
L39: "Ferrite bead on conductor"
Q2 Q4: "MOSFET"
T1 T2 T4 T5: "Transformer"
U1 U3 U7: library part CMP-0780-00038-3, "8-Bit Shift Registers With 3-State Output Registers, D0016A, TUBE", F @ Nom Voltage(Max)(Mhz)=28, Generic Part Number=SN74HC595, ICC @ Nom Voltage(Max)(mA)=0.08, Manufacturer="Texas Instruments", Operating Temperature Range(C)="-40 to 85", Rating=Military, tpd @ Nom Voltage(Max)(ns)=34, Voltage(Nom)(V)=6, 3-State Output=Yes, Bits=8, Code_JEDEC="MS-012 variation AC", DatasheetVersion=SCLS041H, Input Type=CMOS, Output Drive (IOL/IOH)(Max)(mA)=7.8/-7.8, Output Type=CMOS, PackageReference=D0016A, PackageVersion=http://www.ti.com/lit/ml/mpds178g/mpds178g.pdf, Technology Family=HC, VCC(Max)(V)=6, VCC(Min)(V)=2

## Via types
v1: diameter 1.016, hole 0.486, Top Layer, Top to Bottom Layer, Bottom, tented both sides, 1198 vias
v2: diameter 4, hole 3, Top Layer, Top to Bottom Layer, Bottom, 5 vias

## Nets (pads, with @x,y where several pads share a name; then routed paths per layer and width w, separated by ;. In a path a pad name is that pad's centre, name@x,y a point inside that pad or via, vN(x,y) a via of type N, cw(c..) or ccw(c..) an arc to the next point about the centre after c; other vN are vias at no path point)
+3V3: J4.1 R35.1 U1.10 U1.16 U3.10 U3.16 U7.10 U7.16 | length 85.1
  Top Layer, Top w0.23: U1.10@88.713,-20.093 88.713,-21.347 89.044,-21.678 91.332,-21.678 U3.16@92.917,-20.093 ; U3.10@100.537,-20.093 100.508,-20.093 100.508,-16.076 v1(101.993,-14.591)
  Top Layer, Top w0.6: v1@68.488,-20.093 U7.16@69.288,-20.093 ; v1@80.1,-20.093 U1.16@81.093,-20.093 ; U3.16@92.917,-20.093 92.917,-15.194
  Top Layer, Top w1: v1(68.475,-20.085) 68.483,-20.093 v1@68.488,-20.093 ; U7.10@76.908,-20.093 v1(76.944,-18.598) ; v1(80.091,-20.084) v1@80.1,-20.093 ; 92.917,-15.194 93.207,-15.194 93.207,-14.879 v1(93.28,-14.806) ; v1(101.993,-14.591) 103.917,-14.591 107.492,-11.017 J4.1@107.492,-9.997
  Bottom Layer, Bottom w1: v1(68.475,-20.085) 76.944,-20.085 ; v1(76.944,-18.598) 76.944,-20.085 ; R35.1@81.776,-19.696 80.25,-19.696 83.963,-15.983 92.103,-15.983 v1(93.28,-14.806) ; v1(101.993,-14.591) 100.144,-12.743 95.343,-12.743 v1(93.28,-14.806) ; 76.944,-20.085 v1@79.913,-20.085 ; v1@79.913,-20.085 84.03,-15.968 92.118,-15.968 v1(93.28,-14.806) ; v1@79.913,-20.085 v1(80.091,-20.084) 80.09,-20.085 v1@79.913,-20.085
+12: C115.2 C118.2 C119.1 C129.1 C130.2 D3.1 D18.1 D20.1 D21.1 D26.1 FAN_OUT.1 J8.2 K1.1 K2.1 K3.1 K4.1 K5.1 L39.2 L43.2 Q2.2 R41.2 U2.9 U4.9 U6.3 U8.9 | length 353.2
  Top Layer, Top w0.254: K2.1@66.234,-10.614 66.234,-10.42 K2.1@66.557,-10.097
  Top Layer, Top w0.4: v1@45.623,-35.051 U2.9@46.555,-35.051 ; v1@88.142,-34.808 U4.9@90.45,-34.808
  Top Layer, Top w0.65: 117.277,-27.545 Q2.2@117.277,-26.72
  Top Layer, Top w0.8: K4.1@15.242,-53.127 K4.1@15.242,-53.052 ; K1.1@26.375,-5.928 27.041,-6.595 26.961,-6.595 ; 57.244,-23.784 K3.1@57.244,-22.874
  Top Layer, Top w1: K4.1@15.242,-53.127 16.731,-54.616 18.828,-54.616 21.868,-57.656 21.868,-60.528 L39.2@21.907,-60.568 ; K5.1@15.247,-20.174 16.03,-20.174 D21.1@17.843,-21.987 v1(17.788,-22.202) ; D20.1@18.038,-54.616 v1(18.038,-54.584) ; 26.961,-6.595 28.405,-8.039 D18.1@29.503,-8.039 ; D18.1@29.421,-8.039 D18.1@29.503,-8.039 ; v1(29.503,-8.028) D18.1@29.503,-8.039 ; v1(45.464,-34.891) v1@45.623,-35.051 ; D26.1@55.421,-25.607 D26.1@55.584,-25.444 ; v1(55.515,-26.028) D26.1@55.584,-25.444 ; 57.244,-23.784 D26.1@55.584,-25.444 ; v1(60.917,-7.953) D3.1@61.024,-7.883 63.755,-10.614 K2.1@66.234,-10.614 ; v1(88.139,-34.811) v1@88.142,-34.808 ; R41.2@115.259,-28.532 117.277,-28.532 ; 117.277,-27.545 117.277,-28.532 ; FAN_OUT.1@123.843,-33.095 119.279,-28.532 117.277,-28.532 ; v1(165.546,-11.957) 165.43,-11.957 165.55,-11.837 173.529,-11.837 ; L43.2@173.385,-23.481 173.574,-23.292 C115.2@173.574,-16.44 ; C118.2@173.529,-13.936 173.529,-11.837 ; C119.1@176.721,-11.217 176.721,-11.837 173.529,-11.837
  Top Layer, Top w1.4: C118.2@173.529,-13.936 173.529,-16.44 C115.2@173.574,-16.44 ; C119.1@176.721,-11.217 176.937,-11.433 J8.2@183.648,-11.433
  Bottom Layer, Bottom w0.6: U8.9@61.236,-31.219 61.268,-32.019
  Bottom Layer, Bottom w0.95: 41.046,-23.955 U6.3@41.046,-22.98
  Bottom Layer, Bottom w1: v1(18.038,-54.584) 18.038,-44.121 27.772,-34.388 ; 41.046,-23.955 41.046,-25.261 C130.2@40.92,-25.387 40.92,-28.522 C129.1@41.036,-28.638 41.036,-31.969 ; v1(55.515,-26.028) 51.638,-26.028 45.464,-32.203 ; v1(60.917,-7.953) 59.633,-7.953 54.776,-3.097 34.434,-3.097 v1(29.503,-8.028) 26.471,-8.028 17.788,-16.711 v1(17.788,-22.202) 18.45,-22.202 20.635,-24.387 20.635,-27.251 27.772,-34.388 ; 61.268,-32.019 61.268,-34.811 ; v1(165.546,-11.957) 154.553,-22.951 129.93,-22.951 123.843,-29.038 FAN_OUT.1@123.843,-33.095 89.855,-33.095 v1(88.139,-34.811) 61.268,-34.811 ; 27.772,-34.388 30.19,-31.969 41.036,-31.969 ; 41.036,-31.969 45.464,-31.969 45.464,-32.203 ; 45.464,-32.203 v1(45.464,-34.891) 61.268,-34.811
AMP_OUT: C123.2 L44.1 T4.2 | length 22.1
  Top Layer, Top w1.5: T4.2@147.881,-19.302 148.279,-19.302 152.193,-15.389
  Top Layer, Top w1.6: L44.1@146.654,-4.775 152.193,-4.775 C123.2@152.193,-5.147 152.193,-8.802
  Top Layer, Top w1.83: 152.193,-15.389 152.193,-8.802
ATT_ON: D18.2 K1.8 U2.10 | length 40.3
  Top Layer, Top w0.23: K1.8@26.365,-12.328 27.854,-10.839 D18.2@29.421,-10.839 30.939,-12.358 30.939,-15.409 38.12,-22.591 38.12,-29.373 45.621,-36.873 47.576,-36.873 47.825,-36.624 U2.10@47.825,-35.051
BPF_OFF: D20.2 K4.8 U2.12 | length 67.7
  Top Layer, Top w0.23: v1(14.247,-43.718) 14.325,-43.718 14.325,-41.674 24.794,-31.205 37.898,-31.205 44.634,-37.941 49.167,-37.941 50.365,-36.743 U2.12@50.365,-35.051 ; K4.8@15.232,-59.452 D20.2@17.268,-57.416 ; D20.2@18.018,-57.416 D20.2@17.268,-57.416 ; v1(18.118,-57.376) 18.118,-57.416 D20.2@17.268,-57.416
  Bottom Layer, Bottom w0.23: v1(14.247,-43.718) 14.288,-43.759 14.288,-54.304 17.36,-57.376 v1(18.118,-57.376)
BPF_ON_0: R15.1 R19.2 U2.13 | length 25.3
  Top Layer, Top w0.23: v1(37.337,-42.093) 37.47,-42.226 R19.2@37.47,-44.133 37.465,-44.138 R15.1@37.465,-46.038 ; v1(37.337,-37.912) 37.946,-38.521 50.118,-38.521 51.635,-37.004 U2.13@51.635,-35.051
  Bottom Layer, Bottom w0.23: v1(37.337,-42.093) v1(37.337,-37.912)
BPF_ON_1: R13.1 R20.2 U4.14 | length 35.8
  Top Layer, Top w0.23: U4.14@96.8,-34.808 96.8,-36.115 97.515,-36.83 120.743,-36.83 v1(122.913,-39) ; R13.1@121.654,-45.507 121.654,-43.602 R20.2@121.519,-43.602 121.519,-41.073 v1(122.04,-40.552)
  Bottom Layer, Bottom w0.23: v1(122.04,-40.552) 122.913,-39.679 v1(122.913,-39)
BPF_ON_2: R11.1 R21.2 U4.13 | length 29.1
  Top Layer, Top w0.23: U4.13@95.53,-34.808 95.53,-35.989 96.941,-37.4 112.67,-37.4 v1(113.428,-38.158) ; v1(109.974,-42.269) 110.087,-42.381 R21.2@110.087,-43.831 110.198,-43.831 R11.1@110.198,-45.736
  Bottom Layer, Bottom w0.23: v1(109.974,-42.269) 113.428,-38.815 v1(113.428,-38.158)
BPF_ON_3: R9.1 R22.2 U4.12 | length 19.9
  Top Layer, Top w0.23: U4.12@94.26,-34.808 94.205,-34.808 94.205,-36.789 95.757,-38.341 101.215,-38.341 v1(101.25,-38.306) ; v1(96.665,-42.862) 96.791,-42.988 R22.2@96.791,-44.62 96.786,-44.62 R9.1@96.786,-46.525
  Bottom Layer, Bottom w0.23: v1(96.665,-42.862) 101.221,-38.306 v1(101.25,-38.306)
BPF_ON_4: R7.1 R23.2 U4.11 | length 17
  Top Layer, Top w0.23: v1(84.038,-42.787) 84.059,-42.808 R23.2@84.059,-44.625 84.169,-44.625 R7.1@84.169,-46.53 ; v1(89.226,-38.306) 89.885,-37.647 91.735,-37.647 92.99,-36.392 U4.11@92.99,-34.808
  Bottom Layer, Bottom w0.23: v1(84.038,-42.787) 88.518,-38.306 v1(89.226,-38.306)
BPF_ON_5: R5.1 R24.2 U4.10 | length 28
  Top Layer, Top w0.23: v1(71.928,-42.849) 71.925,-42.851 R24.2@71.925,-44.408 72.036,-44.408 R5.1@72.036,-46.764 ; v1(76.769,-38.356) 78.355,-36.77 91.195,-36.77 91.72,-36.244 U4.10@91.72,-34.808
  Bottom Layer, Bottom w0.23: v1(71.928,-42.849) 72.038,-42.849 76.531,-38.356 v1(76.769,-38.356)
BPF_ON_6: R3.1 R25.2 U2.15 | length 22.7
  Top Layer, Top w0.23: U2.15@54.175,-35.051 54.175,-36.145 55.198,-37.167 62.964,-37.167 v1(64.143,-38.347) ; v1(58.868,-43.222) 58.843,-43.248 R25.2@58.843,-44.661 58.965,-44.661 R3.1@58.965,-46.566
  Bottom Layer, Bottom w0.23: v1(58.868,-43.222) 59.268,-43.222 v1(64.143,-38.347)
BPF_ON_7: R1.1 R26.2 U2.14 | length 14.7
  Top Layer, Top w0.23: R1.1@46.422,-46.32 46.422,-44.421 R26.2@46.427,-44.416 46.427,-42.942 v1(46.422,-42.937) ; v1(52.331,-38.238) 52.905,-37.664 U2.14@52.905,-35.051
  Bottom Layer, Bottom w0.23: v1(46.422,-42.937) 47.632,-42.937 v1(52.331,-38.238)
BPF_VCC: C100.2 L39.1 R17.2 R18.1 R19.1 R20.1 R21.1 R22.1 R23.1 R24.1 R25.1 R26.1 | length 455.6
  Top Layer, Top w0.23: L39.1@21.907,-54.068 26.352,-54.068 ; R18.1@26.352,-59.372 26.352,-54.068 ; v1(27.653,-49.187) 27.633,-49.208 R17.2@26.352,-49.208 C100.2@26.348,-51.435 26.348,-54.068 26.352,-54.068 ; v1(39.327,-44.14) 39.362,-44.14 R19.1@39.37,-44.133 ; R26.1@48.327,-44.416 48.364,-44.453 v1(48.364,-44.474) ; v1(60.694,-44.659) 60.74,-44.659 R25.1@60.743,-44.661 ; R24.1@73.825,-44.408 73.861,-44.444 v1(73.861,-44.521) ; R23.1@85.959,-44.625 85.991,-44.658 v1(85.991,-44.667) ; R22.1@98.691,-44.62 98.733,-44.662 v1(98.775,-44.662) ; R21.1@111.987,-43.831 112,-43.844 v1(112,-43.877) ; R20.1@123.419,-43.602 123.419,-42.619 123.467,-42.571 123.467,-43.061 v1(123.513,-43.107)
  Bottom Layer, Bottom w0.23: v1(39.327,-44.14) 34.28,-49.187 v1(27.653,-49.187) ; v1(48.364,-44.474) 43.651,-49.187 v1(27.653,-49.187) ; v1(60.694,-44.659) 56.166,-49.187 v1(27.653,-49.187) ; v1(73.861,-44.521) 69.195,-49.187 v1(27.653,-49.187) ; v1(85.991,-44.667) 81.471,-49.187 v1(27.653,-49.187) ; v1(98.775,-44.662) 94.249,-49.187 v1(27.653,-49.187) ; v1(112,-43.877) 106.689,-49.187 v1(27.653,-49.187) ; v1(123.513,-43.107) 117.433,-49.187 v1(27.653,-49.187)
CTRL_CLK: J4.4 U1.11 U3.11 U7.11 | length 51.7
  Top Layer, Top w0.23: U7.11@75.638,-20.093 75.638,-23.531 v1(75.666,-23.559) ; U1.11@87.443,-20.093 87.443,-23.644 v1(87.482,-23.683) ; v1(99.448,-23.634) 99.267,-23.453 99.267,-15.933 102.544,-12.656 104.373,-12.656 106.192,-10.837 106.192,-8.698 J4.4@104.952,-7.457
  Bottom Layer, Bottom w0.23: v1(75.666,-23.559) 75.696,-23.59 87.328,-23.59 87.359,-23.559 v1(87.482,-23.683) 99.398,-23.683 v1(99.448,-23.634)
CTRL_DATA: J4.6 U3.14 | length 15.5
  Top Layer, Top w0.23: U3.14@95.457,-20.093 95.77,-19.78 95.77,-16.359 101.193,-10.936 101.193,-8.643 102.38,-7.457 J4.6@102.412,-7.457
CTRL_OE: J4.5 R35.2 U1.13 U3.13 U7.13 | length 45.3
  Top Layer, Top w0.23: v1(73.09,-21.814) 73.098,-21.806 U7.13@73.098,-20.093 ; U1.13@84.903,-20.093 84.903,-21.664 v1(84.944,-21.705) ; v1(96.716,-21.678) 96.727,-21.667 96.727,-20.093 96.727,-16.323 103.053,-9.997 J4.5@102.412,-9.997
  Bottom Layer, Bottom w0.23: v1(73.09,-21.814) 84.835,-21.814 v1(84.944,-21.705) ; R35.2@81.776,-21.596 81.776,-21.705 v1(84.944,-21.705) ; v1(96.716,-21.678) 96.689,-21.705 v1(84.944,-21.705)
CTRL_RCLK: J4.3 U1.12 U3.12 U7.12 | length 45.4
  Top Layer, Top w0.23: v1(74.317,-22.715) 74.368,-22.664 U7.12@74.368,-20.168 U7.12@74.368,-20.093 ; v1(86.139,-22.737) 86.173,-22.702 U1.12@86.173,-20.168 U1.12@86.173,-20.093 ; v1(97.999,-22.609) v1(97.999,-22.609) U3.12@97.997,-20.168 97.997,-16.118 102.5,-11.615 103.653,-11.615 104.559,-10.71 104.559,-10.39 J4.3@104.952,-9.997
  Bottom Layer, Bottom w0.23: v1(74.317,-22.715) 74.386,-22.646 85.21,-22.646 85.377,-22.479 85.88,-22.479 v1(86.139,-22.737) 97.871,-22.737 v1(97.999,-22.609)